# Altium PCB PCB.PcbDoc
Units mm, origin at the board's own origin, x right, y up, seen from the top; angles counter-clockwise.
Board outline 152.4 x 101.6 mm, 2 copper layers (Top Layer, Bottom Layer); 35 components, 36 nets, 171 pads, 15 vias.
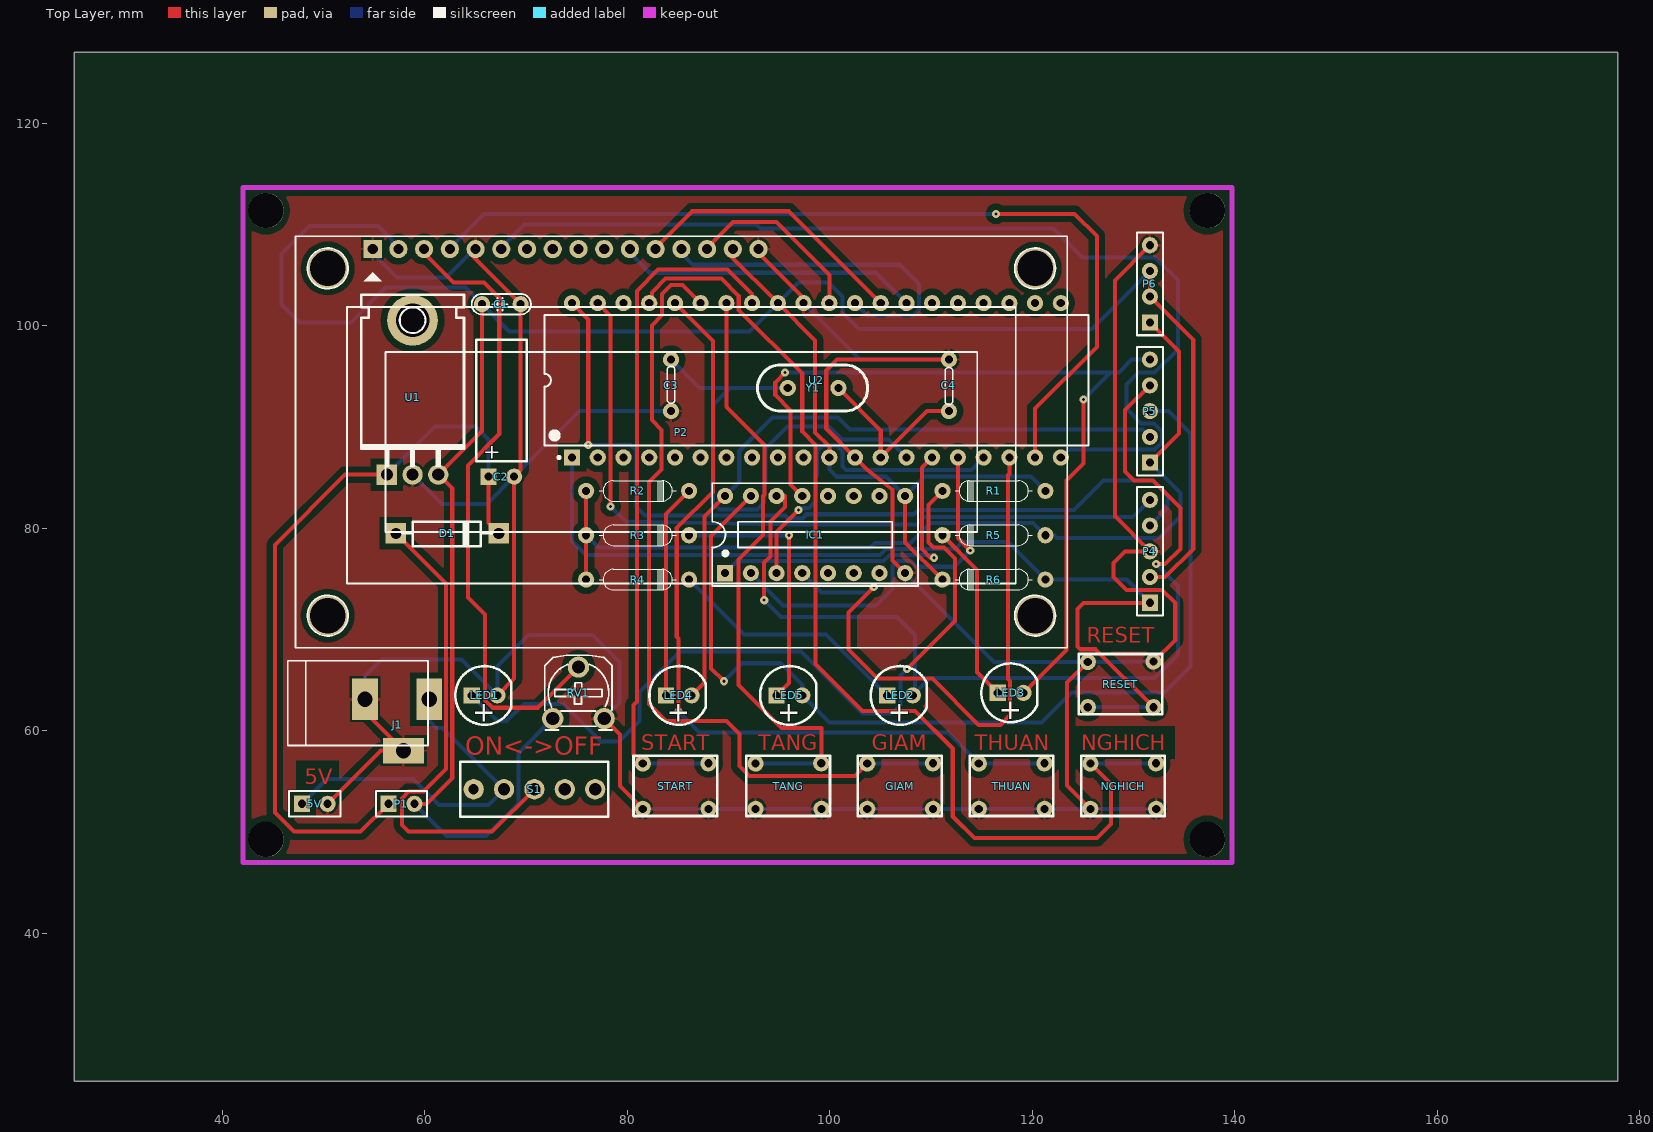
[diagram p0: Top Layer view]
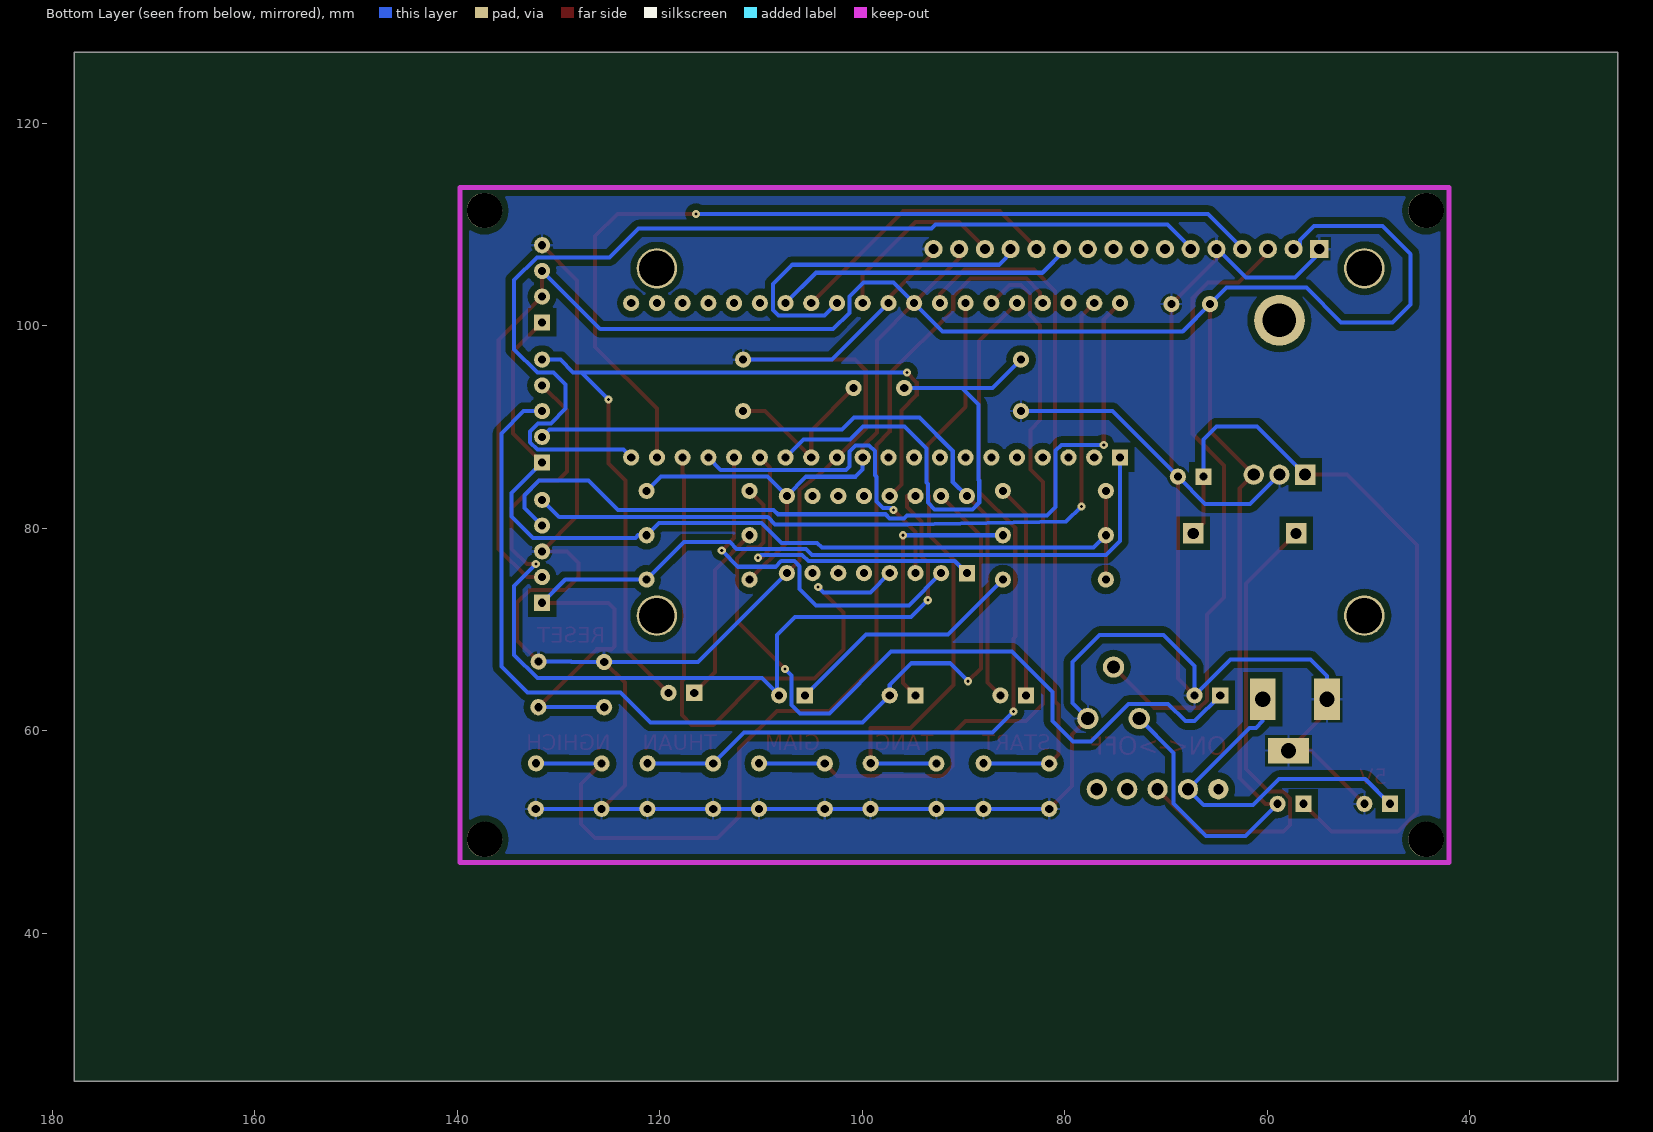
[diagram p1: Bottom Layer view, seen from below]
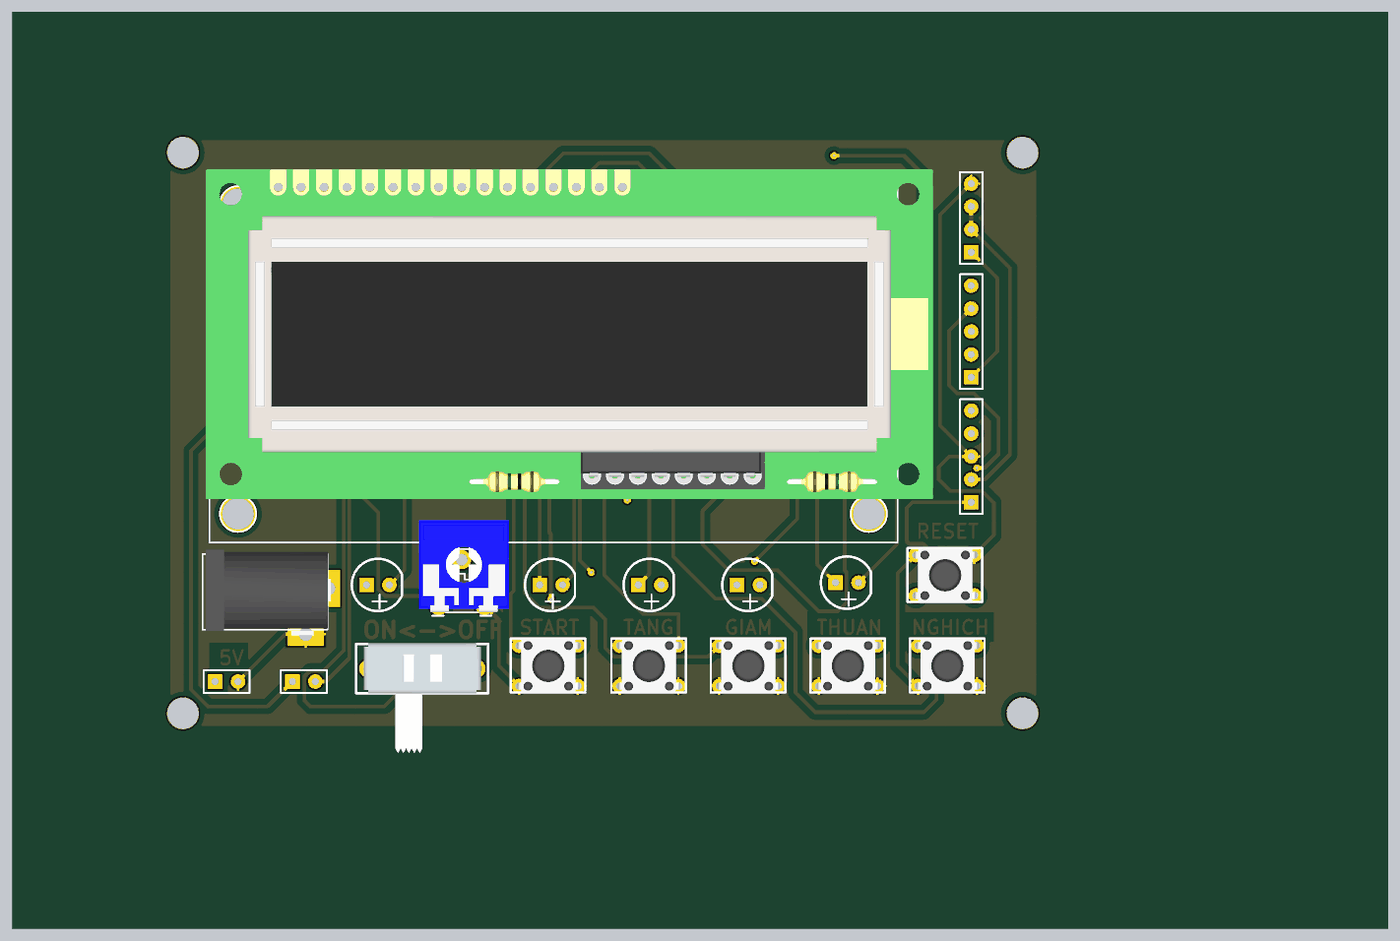
[diagram p2: 3D render of the assembled board from above, using the file's embedded part models]

## Layer stack, top to bottom
Top Solder: solder mask 0.0102, Solder Resist, Dk 3.5
Top Layer: signal copper 0.0356
Dielectric1: dielectric 0.32, FR-4, Dk 4.8
Bottom Layer: signal copper 0.0356
Bottom Solder: solder mask 0.0102, Solder Resist, Dk 3.5

## Board outline
25.4,25.4 177.8,25.4 177.8,127 25.4,127

## Design rules (kind name [scope] priority, off if disabled: settings)
Clearance Clearance_1 [All vs InPolygon] p1: gap=0.635
Clearance [All] p2: gap=0.2
PolygonConnect [All] p1: connectstyle=Relief reliefconductorwidth=0.254 reliefentries=4 polygonreliefangle="90 Angle" airgapwidth=0.254
RoutingVias [All] p1: holewidth=0.3 width=0.8 viastyle="Through Hole" minholewidth=0.3 minwidth=0.8 maxholewidth=0.3 maxwidth=0.8
SilkToSolderMaskClearance SilkscreenOverComponentPads [IsPad] p1: minsilkscreentomaskgap=0.254 clearancetoexposedcopper=TRUE
SolderMaskExpansion [All] p1: expansion=0.2
Width Width_1 [InNet('A6')] p1: maxlimit=0.4 minlimit=0.4 preferedwidth=0.4
Width [All] p2: maxlimit=0.4 minlimit=0.4 preferedwidth=0.4
29 further rules are at their usual default settings.

## Components (designator, comment, footprint, x,y, rotation, side; value= is the part's Value field where it differs from the comment)
5V "5v" HDR1X2 47.879,52.796 r0 top (schematic designator P3)
C1 "104" CN1.5 65.659,102.13 r0 top
C2 "10uF" "C5mm - NAM" 66.294,85.095 r0 top
C3 "Capacitor Ceramic" Tu-ceramic 84.328,96.647 r270 top
C4 "Capacitor Ceramic" Tu-ceramic 111.76,91.567 r90 top
D1 "1N4007" DIODE/POW/1A 57.15,79.502 r0 top
GIAM "SW-4P-S" SW-4P-S 103.695,56.769 r0 top (schematic designator SW3)
IC1 "ULN2003A" DIP16/W0.3 89.662,75.565 r0 top
J1 "PWR1.5" DC-IN 57.277,60.579 r0 top
LED1 "LED5" "LED_phi 5" 65.913,63.5 r0 top
LED2 "LED5" "LED_phi 5" 106.934,63.5 r0 top
LED3 "LED5" "LED_phi 5" 117.856,63.754 r0 top
LED4 "LED5" "LED_phi 5" 85.09,63.5 r0 top
LED5 "LED5" "LED_phi 5" 96.012,63.5 r0 top
NGHICH "SW-4P-S" SW-4P-S 125.73,56.769 r0 top (schematic designator SW5)
P1 "jumper" HDR1X2 56.438,52.796 r0 top
P2 "LCD16x2" LCD16X2 54.864,107.569 r0 top
P4 "BURN-E" HDR1X5 131.608,72.644 r90 top
P5 "Header 5" HDR1X5 131.608,86.487 r90 top
P6 "Header 4" HDR1X4 131.608,100.33 r90 top
R1 "R0.4W" "DIEN TRO 1/4 W" 111.125,83.693 r0 top
R2 "R0.4W" "DIEN TRO 1/4 W" 86.106,83.693 r180 top
R3 "R0.4W" "DIEN TRO 1/4 W" 86.106,79.312 r180 top
R4 "R0.4W" "DIEN TRO 1/4 W" 86.106,74.93 r180 top
R5 "R0.4W" "DIEN TRO 1/4 W" 111.125,79.311 r0 top
R6 "R0.4W" "DIEN TRO 1/4 W" 111.125,74.93 r0 top
RESET "SW-4P-S" SW-4P-S 125.476,66.802 r0 top (schematic designator RESET1)
RV1 "RV20K" VR 72.644,61.214 r0 top
S1 "Switch" Switch 76.835,54.229 r180 top
START "SW-4P-S" SW-4P-S 81.534,56.769 r0 top (schematic designator SW1)
TANG "SW-4P-S" SW-4P-S 92.678,56.769 r0 top (schematic designator SW2)
THUAN "SW-4P-S" SW-4P-S 114.713,56.769 r0 top (schematic designator SW4)
U1 "7805" 7805 58.801,85.295 r0 top
U2 "PIC16F887-I/P" PDIP600-P40 98.679,94.615 r90 top
Y1 "20MHz" XTAL 98.298,93.853 r180 top

## Footprints (in the part's own frame and the unit in brackets; to place one, negate y for a bottom-side part, rotate by r counter-clockwise, add the part's x,y. Pads: shape width x height; smd on the part's side, far side on the other; paste and mask are expansions set on the pad)
7805 [mm] "TO, Thru-Hole, Vertical, Heatsink Mounted; 3 In-Line Leads; Pitch 2.54 mm; Pin sequence 1, 3, 2"
  round 5 hole 3.3: 0(0,15.24)
  rect 2x2 hole 1.2: 1(-2.54,0)
  round 2 hole 1.2: 2(0,0) 3(2.54,0)
  silkscreen extent -5.08,0.76 5.08,17.78
"C5mm - NAM" [mm]
  rect 1.6x1.6 hole 0.8: 1(0,0)
  round 1.6 hole 0.8: 2(2.54,0)
  silkscreen extent -1.22,1.54 3.78,13.54
CN1.5 [mm]
  round 1.6 hole 0.8: 1(0,0) 2(3.81,0)
  silkscreen extent -1.01,-1.02 4.82,1.02, body extent -1.01,-0.85 4.83,0.85, height 5.97
DC-IN [mm] "Jac DC input"
  rect 2.54x4.064 hole 1.5: 1(3.175,2.54) 2(-3.175,2.54)
  rect 4.064x2.54 hole 1.5: 3(0.635,-2.54)
  silkscreen extent -10.79,-2.03 3.05,6.35, body extent -10.42,-2.67 3.4,6.84, height 11.02
"DIEN TRO 1/4 W" [mm]
  round 1.6 hole 0.8: 1(0,0) 2(10.16,0)
  silkscreen extent 1.26,-1.02 8.88,1.02, body extent -0.3,-1.16 10.46,1.16, height 2.93
DIODE/POW/1A [mm]
  rect 2x2 hole 1.1: 1(0,0) 2(10.16,0)
  silkscreen extent 0.64,-1.27 9.53,1.14, body extent -0.38,-1.28 10.54,1.28, height 2.55
DIP16/W0.3 [mm] "16 PIN, W 300mil, Pin to pin 100mil"
  rect 1.6x1.6 hole 0.8: 1(0,0)
  round 1.6 hole 0.8: 2(2.54,0) 3(5.08,0) 4(7.62,0) 5(10.16,0) 6(12.7,0) 7(15.24,0) 8(17.78,0) 9(17.78,7.62) 10(15.24,7.62) 11(12.7,7.62) 12(10.16,7.62) 13(7.62,7.62) 14(5.08,7.62) 15(2.54,7.62) 16(0,7.62)
  silkscreen extent -1.28,-1.27 19.05,8.89, body extent -1.31,-1.46 19.09,9.04, height 7.61
HDR1X2 [mm] "Connector; Header; 2 Position"
  rect 1.6x1.6 hole 0.8: 1(0,0)
  round 1.6 hole 0.8: 2(2.54,0)
  silkscreen extent -1.27,-1.27 3.81,1.27, body extent -1.27,-1.27 3.81,1.27, height 7
HDR1X4 [mm] "Connector; Header; 4 Position"
  rect 1.6x1.6 hole 0.8: 1(0,0)
  round 1.6 hole 0.8: 2(2.54,0) 3(5.08,0) 4(7.62,0)
  silkscreen extent -1.27,-1.27 8.89,1.27, body extent -1.27,-1.27 8.89,1.27, height 7
HDR1X5 [mm] "Connector; Header; 5 Position"
  rect 1.6x1.6 hole 0.8: 1(0,0)
  round 1.6 hole 0.8: 2(2.54,0) 3(5.08,0) 4(7.62,0) 5(10.16,0)
  silkscreen extent -1.27,-1.27 11.43,1.27, body extent -1.27,-1.27 11.43,1.27, height 7
LCD16X2 [mm] "LCD dipslay 16x2, 16 pin"
  rect 1.8x1.8 hole 1: 1(0,0)
  round 1.8 hole 1: 2(2.54,0) 3(5.08,0) 4(7.62,0) 5(10.16,0) 6(12.7,0) 7(15.24,0) 8(17.78,0) 9(20.32,0) 10(22.86,0) 11(25.4,0) 12(27.94,0) 13(30.48,0) 14(33.02,0) 15(35.56,0) 16(38.1,0)
  round 4 hole 3.5: "Hole 0"(-4.445,-36.195) "Hole 0"(-4.445,-1.905) "Hole 0"(65.405,-36.195) "Hole 0"(65.405,-1.905)
  silkscreen extent -7.62,-39.37 68.58,1.27, body extent -7.99,-34.54 72.51,1.96, height 10.52
"LED_phi 5" [mm] "LED phi 5mm"
  rect 1.6x1.6 hole 0.8: 1(-1.27,0)
  round 1.6 hole 0.8: 2(1.27,0)
  silkscreen extent -2.9,-2.9 2.64,2.9
PDIP600-P40 [mm] "DIP, 40-Leads, Row Spacing 15.24mm, Pitch 2.54mm, Body 51.8x13.5mm"
  rect 1.6x1.6 hole 0.8: 1(-7.62,24.13)
  round 1.6 hole 0.8: 2(-7.62,21.59) 3(-7.62,19.05) 4(-7.62,16.51) 5(-7.62,13.97) 6(-7.62,11.43) 7(-7.62,8.89) 8(-7.62,6.35) 9(-7.62,3.81) 10(-7.62,1.27) 11(-7.62,-1.27) 12(-7.62,-3.81) 13(-7.62,-6.35) 14(-7.62,-8.89) 15(-7.62,-11.43) 16(-7.62,-13.97) 17(-7.62,-16.51) 18(-7.62,-19.05) 19(-7.62,-21.59) 20(-7.62,-24.13) 21(7.62,-24.13) 22(7.62,-21.59) 23(7.62,-19.05) 24(7.62,-16.51) 25(7.62,-13.97) 26(7.62,-11.43) 27(7.62,-8.89) 28(7.62,-6.35) 29(7.62,-3.81) 30(7.62,-1.27) 31(7.62,1.27) 32(7.62,3.81) 33(7.62,6.35) 34(7.62,8.89) 35(7.62,11.43) 36(7.62,13.97) 37(7.62,16.51) 38(7.62,19.05) 39(7.62,21.59) 40(7.62,24.13)
  silkscreen extent -7.74,-26.85 6.45,26.85, body extent -7.3,-26.85 7.3,26.85, height 6.35
SW-4P-S [mm]
  round 1.6 hole 0.8: 1(0,0) 2(0,-4.47) 3(6.502,-4.47) 4(6.477,0.025)
  silkscreen extent -0.91,-5.18 7.34,0.79, body extent -0.86,-5.23 7.35,0.76, height 9.52
Switch [mm]
  round 2 hole 1.2: 1(3,0) 2(6,0) 3(9,0) 4(0,0)
  round 2 hole 1: 5(12,0)
  silkscreen extent -1.27,-2.73 13.33,2.73, body extent -0.5,-2.85 12.5,9.35, height 2.6
Tu-ceramic [mm] "Tu gom mini"
  round 1.6 hole 0.8: 1(0,0) 2(5.08,0)
  silkscreen extent 0.64,-0.38 4.32,0.38, body extent -0.38,-0.85 5.46,0.85, height 6.12
VR [mm] "Resistor Variable"
  round 2.1 hole 1.3: 1(0,0) 2(2.54,5.08) 3(5.08,0)
  silkscreen extent -0.79,-1.12 5.87,6.25, body extent -2.21,-0.76 7.79,9.44, height 4.2
XTAL [mm] "Footpin for Crystal 2 pin"
  round 1.6 hole 0.8: 1(-2.552,0.001) 2(2.448,0.001)
  silkscreen extent -5.44,-2.29 5.44,2.29, body extent -5.55,-2.32 5.62,2.35, height 3.63

## Part data
5V P1: library part "Header 2", "Header, 2-Pin"
C1 C2: library part "Cap Pol 3mm", "Polarized Capacitor (Axial)"
C3 C4: library part CapDecop, "Capacitor"
D1: library part "Diode Power", "Diode Power"
GIAM NGHICH RESET START TANG THUAN: library part SW-4PIN-SMALL, "Switch Small 4 Pin"
IC1: "High-Voltage, High-Current Darlington Array"
J1: "Low Voltage Power Supply Connector"
LED1 LED2 LED3 LED4 LED5: library part "LED 5mm", "LED 5mm"
P2: library part "LCD Text"
P4: library part "Header 5", "Header, 5-Pin"
P5: "Header, 5-Pin"
P6: "Header, 4-Pin"
R1 R2 R3 R4 R5 R6: library part "Res 1/4 W", "Resistor"
RV1: library part "Variable Resistor", "Variable Resistor"
U1: library part 7809, "Positive Voltage Regulator"
U2: "Flash-Based, 8-Bit CMOS Microcontroller with nanoWatt Technology, 8K (x14-Bit words) Program Memory, 624 Bytes Data Memory, 35 I/O pins, 40-Pin PDIP, Standard VDD Range, Industrial Temperature"
Y1: library part XTAL, "Crystal Oscillator"

## Free pads (board coordinates)
  round 3.5 hole 3.5: 3(44.323,49.276) 3(44.323,111.379) 3(137.287,49.276) 3(137.287,111.379)

## Via types
v1: diameter 0.8, hole 0.3, Top Layer to Bottom Layer, 15 vias

## Nets (pads, with @x,y where several pads share a name; then routed paths per layer and width w, separated by ;. In a path a pad name is that pad's centre, name@x,y a point inside that pad or via, vN(x,y) a via of type N, cw(c..) or ccw(c..) an arc to the next point about the centre after c; other vN are vias at no path point)
A6: C3.1 U2.14 Y1.2 | length 51.8
  Bottom Layer w0.4: C3.1 87.123,93.852 90.17,93.852 ; Y1.2 90.17,93.852 ; U2.14 105.791,88.773 101.19,88.773 99.92,90.043 95.809,90.043 93.65,87.884 93.65,84.506 93.523,84.379 93.523,82.55 92.841,81.868 89.125,81.868 88.443,82.55 88.443,84.709 88.519,84.785 88.519,92.201 90.17,93.852
A7: C4.1 U2.13 Y1.1 | length 17.2
  Top Layer w0.4: Y1.1 105.029,89.673 U2.13 109.601,91.567 C4.1
B0: START.1 START.4 U2.33 | length 67.8
  Top Layer w0.4: START.1 80.62,57.683 80.62,62.56 80.95,62.89 80.95,103.429 83.058,105.537 89.916,105.537 92.329,103.124 U2.33
  Bottom Layer w0.4: START.1 84.76,56.769 84.785,56.794 START.4
B1: TANG.1 TANG.4 U2.34 | length 60.3
  Top Layer w0.4: U2.34 89.789,91.999 93.548,88.24 93.548,83.312 93.421,83.185 93.421,79.35 90.983,76.911 90.983,64.541 95.25,60.274 99.187,60.274 99.187,56.794 TANG.4
  Bottom Layer w0.4: TANG.1 95.885,56.769 95.91,56.794 TANG.4
B2: GIAM.1 GIAM.4 U2.35 | length 80
  Top Layer w0.4: U2.35 85.471,104.013 84.328,104.013 83.439,103.124 83.439,101.041 82.423,100.025 82.423,90.678 83.388,89.713 83.388,85.801 82.169,84.582 82.169,62.636 83.82,60.985 89.789,60.985 91.084,59.69 91.084,56.515 92.05,55.55 102.476,55.55 GIAM.1
  Bottom Layer w0.4: GIAM.1 106.909,56.769 106.934,56.794 GIAM.4
B3: THUAN.1 THUAN.4 U2.36 | length 81.7
  Top Layer w0.4: U2.36 88.468,98.476 88.468,83.591 84.887,80.01 84.887,69.317 85.065,69.139 v1(85.065,61.9)
  Bottom Layer w0.4: v1(85.065,61.9) 87.147,59.817 111.665,59.817 THUAN.1 117.932,56.769 117.958,56.794 THUAN.4
B4: NGHICH.1 NGHICH.4 U2.37 | length 104.6
  Top Layer w0.4: U2.37 82.423,102.489 82.423,103.273 83.798,104.648 89.294,104.648 91.008,102.933 91.008,101.575 97.282,95.301 97.282,89.541 98.609,88.214 98.609,66.618 103.251,61.976 108.433,61.976 112.141,58.268 112.141,51.562 114.3,49.403 126.365,49.403 127.762,50.8 127.762,54.737 NGHICH.1
  Bottom Layer w0.4: NGHICH.1 128.956,56.769 128.981,56.794 NGHICH.4
B6: P4.5 U2.39 | length 75.5
  Top Layer w0.4: U2.39 78.359,100.965 v1(78.359,82.169)
  Bottom Layer w0.4: v1(78.359,82.169) 79.864,80.664 95.509,80.385 108.599,80.385 109.325,81.111 129.916,81.111 P4.5
B7: P4.4 U2.40 | length 84
  Top Layer w0.4: U2.40 76.149,100.635 v1(76.149,88.24)
  Bottom Layer w0.4: v1(76.149,88.24) 80.328,88.24 80.899,87.668 80.899,82.118 81.749,81.268 95.592,81.268 95.872,80.988 97.312,80.988 97.709,81.385 108.331,81.385 108.759,81.813 124.129,81.813 127.025,84.709 131.902,84.709 133.35,83.261 133.35,82.006 P4.4
D0: P2.4 U2.19 | length 90.9
  Top Layer w0.4: v1(116.408,111.049) 124.155,111.049 126.365,108.839 126.365,97.917 120.269,91.821 U2.19
  Bottom Layer w0.4: P2.4@62.23,107.442 65.837,111.049 v1(116.408,111.049)
D1: P2.6 U2.20 | length 102.1
  Bottom Layer w0.4: P2.6@67.31,107.442 69.85,109.982 92.777,109.982 93.031,109.728 ; 93.158,109.601 122.072,109.601 124.943,106.731 132.131,106.731 134.366,104.496 134.366,97.663 132.08,95.377 130.48,95.377 129.286,94.183 129.286,91.821 130.74,90.367 132.01,90.367 132.817,89.56 132.817,88.494 132.08,87.757 123.571,87.757 U2.20
D4: P2.11 U2.27 | length 29.7
  Bottom Layer w0.4: P2.11@80.01,107.442 82.22,105.232 104.572,105.232 U2.27
D5: P2.12 U2.28 | length 27.8
  Top Layer w0.4: P2.12@82.55,107.442 86.411,111.303 95.961,111.303 U2.28
D6: P2.13 U2.29 | length 34.7
  Bottom Layer w0.4: P2.13@85.09,107.442 86.512,106.02 106.909,106.02 108.788,104.14 108.788,101.536 108.267,101.016 103.708,101.016 U2.29
D7: P2.14 U2.30 | length 18.4
  Top Layer w0.4: P2.14@87.63,107.442 90.424,110.236 94.742,110.236 99.949,105.029 U2.30
MCLR: P4.1 R6.2 RESET.2 RESET.3 U2.1 | length 96.5
  Top Layer w0.4: P4.1 125.07,72.644 124.46,72.034 124.46,68.339 124.746,68.053 126.257,68.053 RESET.3
  Bottom Layer w0.4: U2.1 74.549,78.74 75.924,77.365 104.957,77.365 105.557,77.965 112.408,77.965 113.068,78.626 117.589,78.626 R6.2 129.322,74.93 P4.1 ; RESET.2 RESET.3
NetC2_1: C2.1 D1.2 P1.1 U1.1 | length 75.7
  Top Layer w0.4: U1.1 52.148,85.295 45.212,78.359 45.212,51.943 47.117,50.038 53.68,50.038 P1.1 ; C2.1 66.294,80.518 D1.2
  Bottom Layer w0.4: U1.1 61.009,90.043 65.024,90.043 66.294,88.773 C2.1
NetD1_1: D1.1 S1.2 | length 48.6
  Top Layer w0.4: D1.1 62.122,74.53 62.122,56.229 59.888,53.996 58.415,53.996 57.76,53.34 57.76,50.698 58.42,50.038 66.644,50.038 S1.2
NetIC1_1: IC1.1 U2.15 | length 32.5
  Top Layer w0.4: U2.15 109.093,85.979 109.093,77.963 109.967,77.089 v1(110.287,77.089)
  Bottom Layer w0.4: IC1.1 90.862,76.765 105.325,76.765 105.925,77.365 110.011,77.365 v1(110.287,77.089)
NetIC1_2: IC1.2 U2.16 | length 36.7
  Top Layer w0.4: U2.16 112.649,79.045 v1(113.868,77.826)
  Bottom Layer w0.4: IC1.2 95.377,72.39 104.577,72.39 106.172,73.985 106.172,76.251 106.686,76.765 107.995,76.765 108.56,76.2 112.243,76.2 v1(113.868,77.826)
NetIC1_3: IC1.3 U2.17 | length 33.3
  Top Layer w0.4: IC1.3 94.742,79.629 v1(96.901,81.788)
  Bottom Layer w0.4: v1(96.901,81.788) 97.098,81.985 97.936,81.985 98.603,82.652 98.603,85.09 98.749,85.236 98.749,87.63 99.314,88.195 100.647,88.195 101.27,87.573 101.27,86.106 101.6,85.776 113.97,85.776 U2.17
NetIC1_4: IC1.4 U2.18 | length 60.3
  Top Layer w0.4: v1(104.343,74.193) 101.854,71.704 101.854,68.021 104.724,65.151 110.134,65.151 114.706,60.579 116.84,60.579 117.805,61.544 117.805,64.897 117.602,65.1 117.602,85.242 117.729,85.369 U2.18
  Bottom Layer w0.4: IC1.4 99.187,73.66 103.81,73.66 v1(104.343,74.193)
NetIC1_13: IC1.13 LED3.2 P5.5 | length 85.4
  Top Layer w0.4: v1(95.58,95.377) 94.615,94.412 94.615,93.142 96.139,91.618 96.139,84.328 IC1.13 ; LED3.2 123.368,67.996 123.368,84.734 125.044,86.411 v1(125.044,92.71)
  Bottom Layer w0.4: v1(95.58,95.377) 127.711,95.377 ; v1(125.044,92.71) 127.711,95.377 ; P5.5 129.808,96.647 128.538,95.377 127.711,95.377
NetIC1_14: IC1.14 LED2.2 P5.4 | length 95.2
  Top Layer w0.4: v1(93.523,72.898) 93.523,76.606 94.132,77.216 94.132,80.653 95.58,82.101 95.58,83.185 IC1.14 ; P5.4 129.159,91.658 129.159,85.598 130.048,84.709 131.919,84.709 134.62,82.008 134.62,77.978 133.096,76.454 v1(132.232,76.454)
  Bottom Layer w0.4: v1(93.523,72.898) 95.174,71.247 106.629,71.247 108.433,69.444 LED2.2@108.433,63.729 ; LED2.2 LED2.2@108.433,63.729 ; v1(132.232,76.454) 134.366,74.32 134.366,67.488 132.08,65.202 109.906,65.202 LED2.2@108.433,63.729
NetIC1_15: IC1.15 LED5.2 P5.3 | length 100.5
  Top Layer w0.4: v1(89.535,64.897) 88.265,66.167 88.265,79.248 IC1.15
  Bottom Layer w0.4: v1(89.535,64.897) 91.313,66.675 95.123,66.675 97.282,64.516 LED5.2 99.949,60.833 120.904,60.833 123.85,63.779 133.045,63.779 135.636,66.37 135.636,89.357 133.426,91.567 P5.3
NetIC1_16: IC1.16 LED4.2 P5.2 | length 68.8
  Top Layer w0.4: LED4.2 87.63,64.77 87.63,81.153 IC1.16
  Bottom Layer w0.4: IC1.16 91.059,84.582 91.059,87.63 94.361,90.932 100.812,90.932 101.977,89.767 130.868,89.767 P5.2
NetJ1_1: 5V.1 J1.1 S1.3 | length 35
  Bottom Layer w0.4: 5V.1 50.328,55.245 58.843,55.245 61.418,52.67 66.276,52.67 S1.3 61.764,60.3 61.112,60.3 60.452,60.96 J1.1
NetLED1_1: LED1.1 R1.1 | length 79.5
  Top Layer w0.4: v1(107.62,66.116) 112.344,70.841 112.344,77.007 111.27,78.082 110.259,78.082 109.728,78.613 109.728,82.296 R1.1
  Bottom Layer w0.4: LED1.1 67.183,60.96 68.097,60.96 69.801,62.664 73.683,62.664 77.419,58.928 79.197,58.928 81.229,60.96 81.229,63.856 85.192,67.818 97.155,67.818 103.251,61.722 106.159,61.722 106.985,62.547 106.985,65.481 v1(107.62,66.116)
NetLED2_1: LED2.1 R4.1 | length 24.3
  Bottom Layer w0.4: R4.1 91.516,69.52 99.644,69.52 LED2.1
NetLED3_1: LED3.1 R5.1 | length 17.8
  Top Layer w0.4: R5.1 114.554,75.882 114.554,65.786 LED3.1
NetLED4_1: LED4.1 R2.1 | length 21.1
  Top Layer w0.4: LED4.1 83.82,81.407 R2.1
NetLED5_1: LED5.1 R3.1 | length 26.2
  Top Layer w0.4: LED5.1 95.961,64.719 v1(95.961,79.312)
  Bottom Layer w0.4: R3.1 v1(95.961,79.312)
NetP2_3: P2.3 RV1.2 | length 62.5
  Top Layer w0.4: P2.3@59.69,107.442 62.865,104.267 65.837,104.267 67.361,102.743 67.361,89.306 64.262,86.208 64.262,73.177 65.964,71.476 65.964,62.992 66.675,62.281 71.171,62.281 RV1.2
NetP5_1: P5.1 P6.1 R2.2 R3.2 R4.2 R5.2 | length 93.2
  Top Layer w0.4: R4.2 R3.2 R2.2 ; P5.1 134.493,89.372 134.493,97.445 P6.1
  Bottom Layer w0.4: R3.2 77.146,78.112 103.989,78.112 104.442,78.565 107.978,78.565 109.925,80.511 120.085,80.511 R5.2 122.136,79.311 122.403,79.045 132.486,79.045 134.62,81.178 134.62,83.475 P5.1
VDD: C1.1 IC1.9 P1.2 P2.2 P2.15 P4.2 P6.2 P6.3 R1.2 R6.1 RV1.1 U1.3 U2.11 U2.32 | length 286.3
  Top Layer w0.4: P1.2 60.162,52.796 62.722,55.356 62.722,83.914 U1.3 65.659,89.613 C1.1 ; P2.15@90.17,107.442 90.17,106.934 U2.32 98.552,98.552 98.552,89.452 99.949,88.055 U2.11 ; IC1.9 107.442,78.613 R6.1 ; P4.2 133.118,75.184 135.89,77.956 135.89,98.588 P6.2 P6.3
  Bottom Layer w0.4: P2.2@57.15,107.442 56.769,107.823 56.769,108.458 55.372,109.855 48.641,109.855 45.847,107.061 45.847,102.108 47.625,100.33 52.705,100.33 56.134,103.759 64.03,103.759 C1.1 68.348,99.441 92.075,99.441 U2.32 96.901,104.267 99.873,104.267 101.27,102.87 101.27,101.27 102.87,99.67 125.868,99.67 P6.3 ; P1.2 62.142,49.632 66.04,49.632 69.24,52.832 69.24,57.81 RV1.1 ; U2.11 99.949,85.811 100.67,85.09 105.537,85.09 IC1.9 109.372,85.115 119.863,85.115 R1.2
VSS: 5V.2 C1.2 C2.2 C3.2 C4.2 GIAM.2 GIAM.3 IC1.8 J1.2 J1.3 LED1.2 NGHICH.2 NGHICH.3 P2.1 P2.5 P2.16 P4.3 P6.4 RESET.1 RESET.4 RV1.3 START.2 START.3 TANG.2 TANG.3 THUAN.2 THUAN.3 U1.2 U2.12 U2.31 | length 365
  Top Layer w0.4: 5V.2 55.662,58.039 J1.3 54.102,61.849 J1.2 ; P2.5@64.77,107.442 64.77,106.829 C1.2 69.469,85.73 C2.2 68.834,65.151 LED1.2 ; RV1.3 79.299,59.639 79.299,54.534 START.2 ; P2.16@92.71,107.442 97.409,102.743 U2.31 ; IC1.8 106.172,76.835 106.172,83.82 103.708,85.776 U2.12 99.65,89.834 99.65,95.586 100.711,96.647 C4.2 ; RESET.1 123.444,64.77 123.444,54.585 NGHICH.2 ; P6.4 128.143,104.485 128.143,81.189 P4.3 129.159,77.724 128.016,76.581 128.016,75.184 129.286,73.914 132.817,73.914 134.112,72.619 134.112,68.986 RESET.4
  Bottom Layer w0.4: J1.2 54.102,65.405 55.753,67.056 63.627,67.056 LED1.2 67.183,66.421 70.231,69.469 76.581,69.469 79.248,66.802 79.248,62.738 RV1.3 ; P2.1@54.61,107.442 57.277,104.775 62.103,104.775 P2.5@64.77,107.442 ; U1.2 61.698,82.398 66.137,82.398 C2.2 75.306,91.567 C3.2 ; START.2 START.3 TANG.2 TANG.3 GIAM.2 GIAM.3 THUAN.2 THUAN.3 NGHICH.2 NGHICH.3 ; U2.31 102.997,96.647 C4.2 ; IC1.8 116.205,66.802 RESET.1 128.702,66.802 128.727,66.827 RESET.4
pads on no net: "P2.Hole 0" IC1.5 IC1.6 IC1.7 IC1.10 IC1.11 IC1.12 P2.7 P2.8 P2.9 P2.10 S1.1 S1.4 S1.5 U1.0 U2.2 U2.3 U2.4 U2.5 U2.6 U2.7 U2.8 U2.9 U2.10 U2.21 U2.22 U2.23 U2.24 U2.25 U2.26 U2.38

## Polygon pours and split planes (outlines as drawn)
VSS on Top Layer "Bottom Layer-VSS" (solid, remove dead copper, pour order 5): 42.164,113.411 42.291,113.538 139.446,113.538 139.446,47.244 42.545,47.244 42.291,47.498
VSS on Bottom Layer "Bottom Layer-VSS" (solid, remove dead copper, pour order 11): 42.164,113.284 139.7,113.284 139.446,113.03 139.446,47.498 42.545,47.498 42.291,47.752

## Keep-outs
Keep-Out Layer:
  lines w0.5: 42.037,46.99 42.037,113.665 139.7,113.665 139.7,46.99 42.037,46.99

## Text inside footprints (layer, text, board x,y; h text height)
C2: Top Overlay "+" at 65.761,86.886 h1.52
LED1: Top Overlay "+" at 64.719,60.884 h2.03
LED2: Top Overlay "+" at 105.74,60.884 h2.03
LED3: Top Overlay "+" at 116.662,61.138 h2.03
LED4: Top Overlay "+" at 83.896,60.884 h2.03
LED5: Top Overlay "+" at 94.818,60.884 h2.03
S1: Top Layer "ON<->OFF" at 64.008,57.658 h1.8